# Altium PCB PCB1.PcbDoc
Units mil, origin at the board's own origin, x right, y up, seen from the top; angles counter-clockwise.
Board outline 6000 x 4000 mil, 2 copper layers (Top Layer, Bottom Layer); 124 components, 250 nets, 584 pads, 0 vias.
Unrouted connection lines stored in the file: 295.
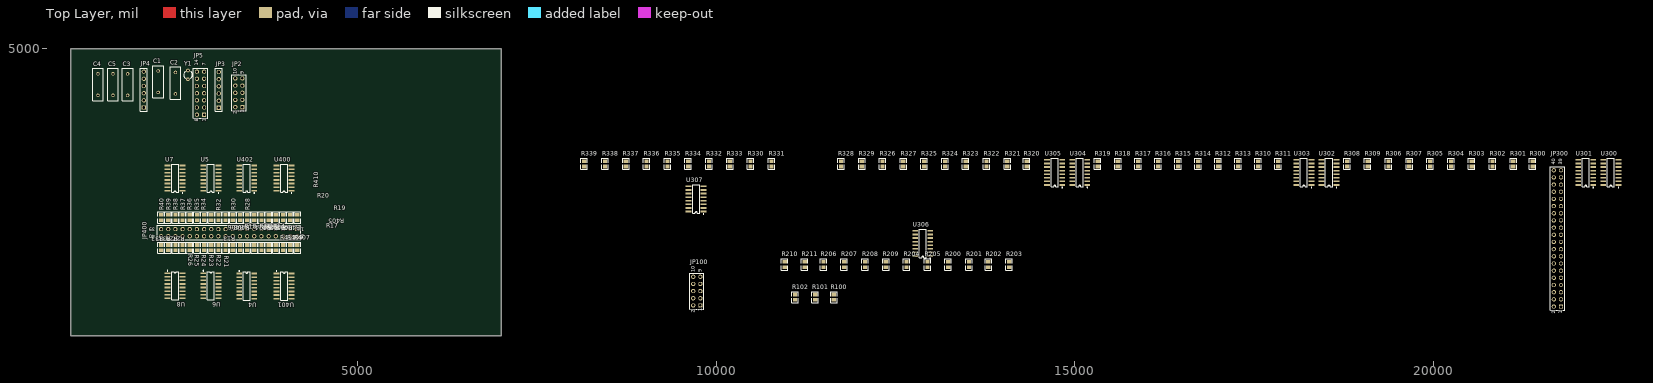
[diagram p0: Top Layer view]
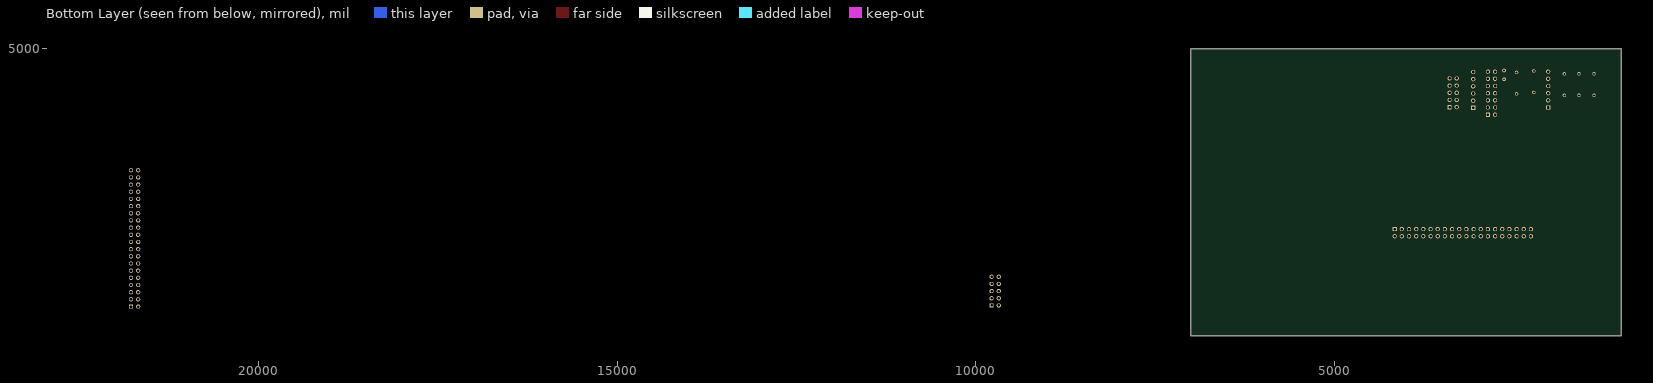
[diagram p1: Bottom Layer view, seen from below]

## Layer stack, top to bottom
Top Layer: signal copper 1.4
Dielectric: dielectric 12.6, FR-4, Dk 4.8
Bottom Layer: signal copper 1.4

## Board outline
1000,1000 7000,1000 7000,5000 1000,5000

## Design rules (kind name [scope] priority, off if disabled: settings)
Clearance [All] p1: gap=10
ComponentClearance [All] p1: gap=10 collisioncheckmode=0
PolygonConnect [All] p1: connectstyle=Relief reliefconductorwidth=10 reliefentries=4 polygonreliefangle="90 Angle"
RoomDefinition U_ShiftregisterTeil1 [InComponentClass('U_ShiftregisterTeil1')] p1: confinementstyle=ConfineIn formatcopy=TRUE outline 8105,1290 22630,1290 22630,3585 8105,3585
RoomDefinition U_farbBorg [InComponentClass('U_farbBorg')] p2: confinementstyle=ConfineIn formatcopy=TRUE outline 1215,3960 3635,3960 3635,4955 1215,4955
RoomDefinition U_ShiftregisterTeil2 [InComponentClass('U_ShiftregisterTeil2')] p3: confinementstyle=ConfineIn formatcopy=TRUE outline 1655,1310 4855,1310 4855,3735 1655,3735
RoomDefinition U_MMC-CAN [InComponentClass('U_MMC-CAN')] p4: confinementstyle=ConfineIn formatcopy=TRUE outline 4695,3915 6695,3915 6695,4915 4695,4915
RoutingLayers [All] p1: top layer=Horizontal bottom layer=Vertical
RoutingVias [All] p1: holewidth=28 width=50 viastyle="Through Hole" minholewidth=28 minwidth=50 maxholewidth=28 maxwidth=50
SolderMaskExpansion [All] p1: expansion=4
TestPointUsage [All] p1: valid=0 allowmultiple=FALSE
Testpoint [All] p1: side=15 testpointundercomponent=TRUE minsize=40 maxsize=100 preferedsize=60 minholesize=0 maxholesize=40 preferedholesize=32 testpointgrid=1 style=1023 order=-539222988
Width [All] p1: maxlimit=10 minlimit=10 preferedwidth=10
16 further rules are at their usual default settings.

## Classes and differential pairs
component class U_farbBorg: C1 C2 C3 C4 C5 JP2 JP3 JP4 JP5 JP100 R100 R101 R102 Y1
component class U_MMC-CAN: Q1 Q2 Q3 Q4 Q5 Q6 Q7 Q8 R200 R201 R202 R203 R204 R205 R206 R207 R208 R209 R210 R211
component class U_ShiftregisterTeil2: JP400 R12 R13 R14 R15 R16 R17 R18 R19 R20 R21 R22 R23 R24 R25 R26 R27 R28 R29 R30 R31 R32 R33 R34 R35 R36 R37 R38 R39 R40 R400 R401 R402 R403 R404 R405 R406 R407 R408 R409 R410 R411 U1 U4 U5 U6 U7 U8 U400 U401 U402
component class U_ShiftregisterTeil1: JP300 R300 R301 R302 R303 R304 R305 R306 R307 R308 R309 R310 R311 R312 R313 R314 R315 R316 R317 R318 R319 R320 R321 R322 R323 R324 R325 R326 R327 R328 R329 R330 R331 R332 R333 R334 R335 R336 R337 R338 R339 U300 U301 U302 U303 U304 U305 U306 U307
net class A[0..14]: A0 A1 A2 A3 A4 A5 A6 A7 A8 A9 A10 A11 A12 A13 A14
net class D[0..7]: D0 D1 D2 D3 D4 D5 D6 D7

## Components (designator, comment, footprint, x,y, rotation, side; value= is the part's Value field where it differs from the comment)
C1 "Cap" RAD-0.3 2220,4540 r90 top
C2 "Cap" RAD-0.3 2460,4520 r90 top
C3 "Cap" RAD-0.3 1795,4500 r90 top
C4 "Cap" RAD-0.3 1380,4500 r90 top
C5 "Cap" RAD-0.3 1590,4500 r90 top
JP2 "AVR-JTAG-PROG" HDR2X5 3395,4185 r90 top
JP3 "JTAG-CPLD" HDR1X6 3065,4175 r90 top
JP4 "Joystick" HDR1X6 2020,4180 r90 top
JP5 "Header 7X2A" HDR2X7_CEN 2860,4080 r90 top
JP100 "AVR-SPI-PROG" HDR2X5 9780,1420 r90 top
JP300 "Header 20X2" HDR2X20 21780,1405 r90 top
JP400 "Header 20X2" HDR2X20 4160,2485 r180 top
R13 "" CR2012-0805 3260,2645 r270 top
R14 "" CR2012-0805 3860,2225 r90 top
R15 "" CR2012-0805 3760,2225 r90 top
R16 "" CR2012-0805 3660,2225 r90 top
R17 "" CR2012-0805 3560,2225 r90 top
R18 "" CR2012-0805 3460,2225 r90 top
R19 "" CR2012-0805 3360,2225 r90 top
R20 "" CR2012-0805 3260,2225 r90 top
R21 "" CR2012-0805 3160,2645 r270 top
R22 "" CR2012-0805 3060,2645 r270 top
R23 "" CR2012-0805 2960,2645 r270 top
R24 "" CR2012-0805 2860,2645 r270 top
R25 "" CR2012-0805 2760,2645 r90 top
R26 "" CR2012-0805 2660,2645 r90 top
R27 "" CR2012-0805 2560,2645 r270 top
R28 "" CR2012-0805 3160,2225 r90 top
R29 "" CR2012-0805 2460,2645 r270 top
R30 "" CR2012-0805 3060,2225 r90 top
R31 "" CR2012-0805 2360,2645 r270 top
R32 "" CR2012-0805 2960,2225 r90 top
R33 "" CR2012-0805 2260,2645 r270 top
R34 "" CR2012-0805 2860,2225 r90 top
R35 "" CR2012-0805 2760,2225 r90 top
R36 "" CR2012-0805 2660,2225 r90 top
R37 "" CR2012-0805 2560,2225 r90 top
R38 "" CR2012-0805 2460,2225 r90 top
R39 "" CR2012-0805 2360,2225 r90 top
R40 "" CR2012-0805 2260,2225 r90 top
R100 "PullUp" CR2012-0805 11640,1535 r90 top
R101 "PullUp" CR2012-0805 11380,1535 r90 top
R102 "PullUp" CR2012-0805 11100,1535 r90 top
R200 "Res2" CR2012-0805 13235,1990 r90 top
R201 "Res2" CR2012-0805 13525,1990 r90 top
R202 "Res2" CR2012-0805 13795,1990 r90 top
R203 "Res2" CR2012-0805 14085,1990 r90 top
R204 "Res2" CR2012-0805 12655,1990 r90 top
R205 "Res2" CR2012-0805 12945,1990 r90 top
R206 "Res2" CR2012-0805 11495,1990 r90 top
R207 "Res2" CR2012-0805 11785,1990 r90 top
R208 "Res2" CR2012-0805 12075,1990 r90 top
R209 "Res2" CR2012-0805 12365,1990 r90 top
R210 "Res2" CR2012-0805 10955,1990 r90 top
R211 "Res2" CR2012-0805 11235,1990 r90 top
R300 "" CR2012-0805 21385,3395 r90 top
R301 "" CR2012-0805 21115,3395 r90 top
R302 "" CR2012-0805 20825,3395 r90 top
R303 "" CR2012-0805 20535,3395 r90 top
R304 "" CR2012-0805 20245,3395 r90 top
R305 "" CR2012-0805 19955,3395 r90 top
R306 "" CR2012-0805 19375,3395 r90 top
R307 "" CR2012-0805 19665,3395 r90 top
R308 "" CR2012-0805 18795,3395 r90 top
R309 "" CR2012-0805 19085,3395 r90 top
R310 "" CR2012-0805 17555,3395 r90 top
R311 "" CR2012-0805 17835,3395 r90 top
R312 "" CR2012-0805 17000,3395 r90 top
R313 "" CR2012-0805 17275,3395 r90 top
R314 "" CR2012-0805 16720,3395 r90 top
R315 "" CR2012-0805 16440,3395 r90 top
R316 "" CR2012-0805 16160,3395 r90 top
R317 "" CR2012-0805 15880,3395 r90 top
R318 "" CR2012-0805 15600,3395 r90 top
R319 "" CR2012-0805 15320,3395 r90 top
R320 "" CR2012-0805 14330,3395 r90 top
R321 "" CR2012-0805 14060,3395 r90 top
R322 "" CR2012-0805 13770,3395 r90 top
R323 "" CR2012-0805 13480,3395 r90 top
R324 "" CR2012-0805 13190,3395 r90 top
R325 "" CR2012-0805 12900,3395 r90 top
R326 "" CR2012-0805 12320,3395 r90 top
R327 "" CR2012-0805 12610,3395 r90 top
R328 "" CR2012-0805 11740,3395 r90 top
R329 "" CR2012-0805 12030,3395 r90 top
R330 "" CR2012-0805 10480,3395 r90 top
R331 "" CR2012-0805 10770,3395 r90 top
R332 "" CR2012-0805 9900,3395 r90 top
R333 "" CR2012-0805 10190,3395 r90 top
R334 "" CR2012-0805 9610,3395 r90 top
R335 "" CR2012-0805 9320,3395 r90 top
R336 "" CR2012-0805 9030,3395 r90 top
R337 "" CR2012-0805 8740,3395 r90 top
R338 "" CR2012-0805 8450,3395 r90 top
R339 "" CR2012-0805 8160,3395 r90 top
R400 "" CR2012-0805 4160,2645 r270 top
R401 "" CR2012-0805 4060,2645 r270 top
R402 "" CR2012-0805 3960,2645 r270 top
R403 "" CR2012-0805 3860,2645 r270 top
R404 "" CR2012-0805 3760,2645 r270 top
R405 "" CR2012-0805 3660,2645 r270 top
R406 "" CR2012-0805 3560,2645 r270 top
R407 "" CR2012-0805 4160,2225 r90 top
R408 "" CR2012-0805 3460,2645 r270 top
R409 "" CR2012-0805 4060,2225 r90 top
R410 "" CR2012-0805 3360,2645 r270 top
R411 "" CR2012-0805 3960,2225 r90 top
U4 "SN74HC595D" D016 3455,1690 r270 top
U5 "SN74HC595D" D016 2955,3195 r90 top
U6 "SN74HC595D" D016 2955,1695 r270 top
U7 "SN74HC595D" D016 2455,3195 r90 top
U8 "SN74HC595D" D016 2455,1695 r270 top
U300 "SN74HC595D" D016 22475,3275 r90 top
U301 "SN74HC595D" D016 22125,3275 r90 top
U302 "SN74HC595D" D016 18545,3275 r90 top
U303 "SN74HC595D" D016 18195,3275 r90 top
U304 "SN74HC595D" D016 15070,3275 r90 top
U305 "SN74HC595D" D016 14720,3275 r90 top
U306 "SN74HC595D" D016 12880,2285 r90 top
U307 "SN74HC595D" D016 9720,2905 r90 top
U400 "SN74HC595D" D016 3975,3195 r90 top
U401 "SN74HC595D" D016 3975,1690 r270 top
U402 "SN74HC595D" D016 3455,3195 r90 top
Y1 "16Mhz" BCY-W2/D3.1 2635,4635 r0 top

## Footprints (in the part's own frame and the unit in brackets; to place one, negate y for a bottom-side part, rotate by r counter-clockwise, add the part's x,y. Pads: shape width x height; smd on the part's side, far side on the other; paste and mask are expansions set on the pad)
BCY-W2/D3.1 [mm]
  round 1.3 hole 0.7: 1(0,1.55) 2(0,-1.55)
  silkscreen extent -1.55,-1.19 1.55,1.17
CR2012-0805 [mm]
  rect 1.3x1.5 smd: 1(-0.95,0) 2(0.95,0)
  silkscreen extent -2,-1.15 2,1.15
D016 [mm] "Small Outline; 16 Leads; Body Width 3.9 mm; Pitch 1.27 mm"
  rect 0.6x2.05 smd: 1(-4.445,-2.675) 2(-3.175,-2.675) 3(-1.905,-2.675) 4(-0.635,-2.675) 5(0.635,-2.675) 6(1.905,-2.675) 7(3.175,-2.675) 8(4.445,-2.675) 9(4.445,2.675) 10(3.175,2.675) 11(1.905,2.675) 12(0.635,2.675) 13(-0.635,2.675) 14(-1.905,2.675) 15(-3.175,2.675) 16(-4.445,2.675)
  silkscreen extent -5.42,-2.8 5,1.25
HDR1X6 [mm] "Connector; Header; 6 Position"
  rect 1.5x1.5 hole 0.9: 1(0,0)
  round 1.5 hole 0.9: 2(2.54,0) 3(5.08,0) 4(7.62,0) 5(10.16,0) 6(12.7,0)
  silkscreen extent -1.27,-1.27 13.97,1.27
HDR2X5 [mm] "Connector; Header; 5x2 Position"
  rect 1.5x1.5 hole 0.9: 1(0,0)
  round 1.5 hole 0.9: 2(0,2.54) 3(2.54,0) 4(2.54,2.54) 5(5.08,0) 6(5.08,2.54) 7(7.62,0) 8(7.62,2.54) 9(10.16,0) 10(10.16,2.54)
  silkscreen extent -1.27,-1.27 11.43,3.81
HDR2X7_CEN [mm] "Connector; Header; 7x2 Position"
  rect 1.5x1.5 hole 0.9: 1(0,0)
  round 1.5 hole 0.9: 2(2.54,0) 3(5.08,0) 4(7.62,0) 5(10.16,0) 6(12.7,0) 7(15.24,0) 8(0,2.54) 9(2.54,2.54) 10(5.08,2.54) 11(7.62,2.54) 12(10.16,2.54) 13(12.7,2.54) 14(15.24,2.54)
  silkscreen extent -1.27,-1.27 16.51,3.81
HDR2X20 [mm] "Connector; Header; 20x2 Position"
  rect 1.5x1.5 hole 0.9: 1(0,0)
  round 1.5 hole 0.9: 2(0,2.54) 3(2.54,0) 4(2.54,2.54) 5(5.08,0) 6(5.08,2.54) 7(7.62,0) 8(7.62,2.54) 9(10.16,0) 10(10.16,2.54) 11(12.7,0) 12(12.7,2.54) 13(15.24,0) 14(15.24,2.54) 15(17.78,0) 16(17.78,2.54) 17(20.32,0) 18(20.32,2.54) 19(22.86,0) 20(22.86,2.54) 21(25.4,0) 22(25.4,2.54) 23(27.94,0) 24(27.94,2.54) 25(30.48,0) 26(30.48,2.54) 27(33.02,0) 28(33.02,2.54) 29(35.56,0) 30(35.56,2.54) 31(38.1,0) 32(38.1,2.54) 33(40.64,0) 34(40.64,2.54) 35(43.18,0) 36(43.18,2.54) 37(45.72,0) 38(45.72,2.54) 39(48.26,0) 40(48.26,2.54)
  silkscreen extent -1.27,-1.27 49.53,3.81
RAD-0.3 [mm]
  round 1.2 hole 0.7: 1(-3.81,0) 2(3.81,0)
  silkscreen extent -5.71,-1.91 5.71,1.91

## Part data
C1 C2 C3 C4 C5: "Capacitor"
JP2 JP100: library part "Header 5X2", "Header, 5-Pin, Dual row"
JP3 JP4: library part "Header 6", "Header, 6-Pin"
JP5: "Header, 7-Pin, Dual row"
JP300 JP400: "Header, 20-Pin, Dual row"
R13 R14 R15 R16 R17 R18 R19 R20 R21 R22 R23 R24 R25 R26 R27 R28 R29 R30 R31 R32 R33 R34 R35 R36 R37 R38 R39 R40 R100 R101 R102 R300 R301 R302 R303 R304 R305 R306 R307 R308 R309 R310 R311 R312 R313 R314 R315 R316 R317 R318 R319 R320 R321 R322 R323 R324 R325 R326 R327 R328 R329 R330 R331 R332 R333 R334 R335 R336 R337 R338 R339 R400 R401 R402 R403 R404 R405 R406 R407 R408 R409 R410 R411: library part Res2, "Resistor"
R200 R201 R202 R203 R204 R205 R206 R207 R208 R209 R210 R211: "Resistor"
U4 U5 U6 U7 U8 U300 U301 U302 U303 U304 U305 U306 U307 U400 U401 U402: "8-Bit Shift Register with 3-State Output Registers"
Y1: library part XTAL, "Crystal Oscillator"

## Nets (pads, with @x,y where several pads share a name; then routed paths per layer and width w, separated by ;. In a path a pad name is that pad's centre, name@x,y a point inside that pad or via, vN(x,y) a via of type N, cw(c..) or ccw(c..) an arc to the next point about the centre after c; other vN are vias at no path point)
A0: 
A1: 
A2: 
A3: 
A4: 
A5: 
A6: 
A7: 
A8: 
A9: 
A10: 
A11: 
A12: 
A13: 
A14: 
AVR-MISO: 
AVR-MOSI: 
AVR-PMISO: JP100.9
AVR-PMOSI: JP100.1
AVR-RESET: JP2.4 JP100.5 R102.2
AVR-SCK: JP100.7
AVR-TCK: JP2.1
AVR-TDI: JP2.9
AVR-TDO: JP2.3
AVR-TMS: JP2.5
CAN-CS: R101.1
CPLD-CLK: 
CPLD-EN: 
CPLD-TCK: JP3.4
CPLD-TDI: JP3.2
CPLD-TDO: JP3.3
CPLD-TMS: JP3.1
D0: U300.14
D1: U303.14
D2: U304.14
D3: U307.14
D4: U400.14
D5: U4.14
D6: U5.14
D7: U8.14
GND: C1.2 C2.1 C3.1 C4.1 C5.1 JP2.2 JP2.10 JP3.5 JP4.6 JP100.3 JP100.4 JP100.6 JP100.8 JP100.10 U4.8 U4.13 U5.8 U5.13 U6.8 U6.13 U7.8 U7.13 U8.8 U8.13 U300.8 U300.13 U301.8 U301.13 U302.8 U302.13 U303.8 U303.13 U304.8 U304.13 U305.8 U305.13 U306.8 U306.13 U307.8 U307.13 U400.8 U400.13 U401.8 U401.13 U402.8 U402.13
JOY-DOWN: JP4.2
JOY-FIRE: JP4.5
JOY-LEFT: JP4.4
JOY-RIGHT: JP4.3
JOY-UP: JP4.1
MISO: R203.1
MISO3V: R205.2
MMC-CS: R100.1 R211.2
MMC-CS3V: R209.1
MOSI: R210.2
MOSI3V: R207.1
NetC1_1: C1.1 Y1.2
NetC2_2: C2.2 Y1.1
NetJP5_1: JP5.1
NetJP5_2: JP5.2
NetJP5_3: JP5.3
NetJP5_4: JP5.4
NetJP5_5: JP5.5
NetJP5_6: JP5.6
NetJP5_7: JP5.7
NetJP5_8: JP5.8
NetJP5_9: JP5.9
NetJP5_10: JP5.10
NetJP5_11: JP5.11
NetJP5_12: JP5.12
NetJP5_13: JP5.13
NetJP5_14: JP5.14
NetJP300_1: JP300.1 R300.2
NetJP300_2: JP300.2 R307.2
NetJP300_3: JP300.3 R301.2
NetJP300_4: JP300.4 R309.2
NetJP300_5: JP300.5 R302.2
NetJP300_6: JP300.6 R311.2
NetJP300_7: JP300.7 R303.2
NetJP300_8: JP300.8 R313.2
NetJP300_9: JP300.9 R304.2
NetJP300_10: JP300.10 R314.2
NetJP300_11: JP300.11 R305.2
NetJP300_12: JP300.12 R315.2
NetJP300_13: JP300.13 R306.2
NetJP300_14: JP300.14 R316.2
NetJP300_15: JP300.15 R308.2
NetJP300_16: JP300.16 R317.2
NetJP300_17: JP300.17 R310.2
NetJP300_18: JP300.18 R318.2
NetJP300_19: JP300.19 R312.2
NetJP300_20: JP300.20 R319.2
NetJP300_21: JP300.21 R320.2
NetJP300_22: JP300.22 R327.2
NetJP300_23: JP300.23 R321.2
NetJP300_24: JP300.24 R329.2
NetJP300_25: JP300.25 R322.2
NetJP300_26: JP300.26 R331.2
NetJP300_27: JP300.27 R323.2
NetJP300_28: JP300.28 R333.2
NetJP300_29: JP300.29 R324.2
NetJP300_30: JP300.30 R334.2
NetJP300_31: JP300.31 R325.2
NetJP300_32: JP300.32 R335.2
NetJP300_33: JP300.33 R326.2
NetJP300_34: JP300.34 R336.2
NetJP300_35: JP300.35 R328.2
NetJP300_36: JP300.36 R337.2
NetJP300_37: JP300.37 R330.2
NetJP300_38: JP300.38 R338.2
NetJP300_39: JP300.39 R332.2
NetJP300_40: JP300.40 R339.2
NetJP400_1: JP400.1 R400.2
NetJP400_2: JP400.2 R407.2
NetJP400_3: JP400.3 R401.2
NetJP400_4: JP400.4 R409.2
NetJP400_5: JP400.5 R402.2
NetJP400_6: JP400.6 R411.2
NetJP400_7: JP400.7 R403.2
NetJP400_8: JP400.8 R14.2
NetJP400_9: JP400.9 R404.2
NetJP400_10: JP400.10 R15.2
NetJP400_11: JP400.11 R405.2
NetJP400_12: JP400.12 R16.2
NetJP400_13: JP400.13 R406.2
NetJP400_14: JP400.14 R17.2
NetJP400_15: JP400.15 R408.2
NetJP400_16: JP400.16 R18.2
NetJP400_17: JP400.17 R410.2
NetJP400_18: JP400.18 R19.2
NetJP400_19: JP400.19 R13.2
NetJP400_20: JP400.20 R20.2
NetJP400_21: JP400.21 R21.2
NetJP400_22: JP400.22 R28.2
NetJP400_23: JP400.23 R22.2
NetJP400_24: JP400.24 R30.2
NetJP400_25: JP400.25 R23.2
NetJP400_26: JP400.26 R32.2
NetJP400_27: JP400.27 R24.2
NetJP400_28: JP400.28 R34.2
NetJP400_29: JP400.29 R25.2
NetJP400_30: JP400.30 R35.2
NetJP400_31: JP400.31 R26.2
NetJP400_32: JP400.32 R36.2
NetJP400_33: JP400.33 R27.2
NetJP400_34: JP400.34 R37.2
NetJP400_35: JP400.35 R29.2
NetJP400_36: JP400.36 R38.2
NetJP400_37: JP400.37 R31.2
NetJP400_38: JP400.38 R39.2
NetJP400_39: JP400.39 R33.2
NetJP400_40: JP400.40 R40.2
NetQ200_1: R200.1
NetQ201_1: R202.1
NetQ202_1: R204.1
NetQ203_1: R205.1
NetQ204_1: R206.1
NetQ205_1: R208.1
NetQ206_1: R210.1
NetQ207_1: R211.1
NetR13_1: R13.1 U402.1
NetR14_1: R14.1 U4.6
NetR15_1: R15.1 U4.5
NetR16_1: R16.1 U4.4
NetR17_1: R17.1 U4.3
NetR18_1: R18.1 U4.2
NetR19_1: R19.1 U4.1
NetR20_1: R20.1 U4.15
NetR21_1: R21.1 U5.15
NetR22_1: R22.1 U5.1
NetR23_1: R23.1 U5.2
NetR24_1: R24.1 U5.3
NetR25_1: R25.1 U5.4
NetR26_1: R26.1 U5.5
NetR27_1: R27.1 U5.6
NetR28_1: R28.1 U6.1
NetR29_1: R29.1 U5.7
NetR30_1: R30.1 U6.15
NetR31_1: R31.1 U7.15
NetR32_1: R32.1 U8.7
NetR33_1: R33.1 U7.1
NetR34_1: R34.1 U8.6
NetR35_1: R35.1 U8.5
NetR36_1: R36.1 U8.4
NetR37_1: R37.1 U8.3
NetR38_1: R38.1 U8.2
NetR39_1: R39.1 U8.1
NetR40_1: R40.1 U8.15
NetR300_1: R300.1 U300.15
NetR301_1: R301.1 U300.1
NetR302_1: R302.1 U300.2
NetR303_1: R303.1 U300.3
NetR304_1: R304.1 U300.4
NetR305_1: R305.1 U300.5
NetR306_1: R306.1 U300.6
NetR307_1: R307.1 U301.1
NetR308_1: R308.1 U300.7
NetR309_1: R309.1 U301.15
NetR310_1: R310.1 U302.15
NetR311_1: R311.1 U303.7
NetR312_1: R312.1 U302.1
NetR313_1: R313.1 U303.6
NetR314_1: R314.1 U303.5
NetR315_1: R315.1 U303.4
NetR316_1: R316.1 U303.3
NetR317_1: R317.1 U303.2
NetR318_1: R318.1 U303.1
NetR319_1: R319.1 U303.15
NetR320_1: R320.1 U304.15
NetR321_1: R321.1 U304.1
NetR322_1: R322.1 U304.2
NetR323_1: R323.1 U304.3
NetR324_1: R324.1 U304.4
NetR325_1: R325.1 U304.5
NetR326_1: R326.1 U304.6
NetR327_1: R327.1 U305.1
NetR328_1: R328.1 U304.7
NetR329_1: R329.1 U305.15
NetR330_1: R330.1 U306.15
NetR331_1: R331.1 U307.7
NetR332_1: R332.1 U306.1
NetR333_1: R333.1 U307.6
NetR334_1: R334.1 U307.5
NetR335_1: R335.1 U307.4
NetR336_1: R336.1 U307.3
NetR337_1: R337.1 U307.2
NetR338_1: R338.1 U307.1
NetR339_1: R339.1 U307.15
NetR400_1: R400.1 U400.15
NetR401_1: R401.1 U400.1
NetR402_1: R402.1 U400.2
NetR403_1: R403.1 U400.3
NetR404_1: R404.1 U400.4
NetR405_1: R405.1 U400.5
NetR406_1: R406.1 U400.6
NetR407_1: R407.1 U401.1
NetR408_1: R408.1 U400.7
NetR409_1: R409.1 U401.15
NetR410_1: R410.1 U402.15
NetR411_1: R411.1 U4.7
NetU5_9: U5.9 U7.14
NetU6_14: U6.14 U8.9
NetU100_33: 
NetU100_34: 
NetU300_9: U300.9 U302.14
NetU304_9: U304.9 U306.14
NetU305_14: U305.14 U307.9
NetU400_9: U400.9 U402.14
SCK: R204.2
SCK3V: R201.1
SHIFTCLK: U4.11 U5.11 U6.11 U7.11 U8.11 U300.11 U301.11 U302.11 U303.11 U304.11 U305.11 U306.11 U307.11 U400.11 U401.11 U402.11
SHIFTOUTCLK: U4.12 U5.12 U6.12 U7.12 U8.12 U300.12 U301.12 U302.12 U303.12 U304.12 U305.12 U306.12 U307.12 U400.12 U401.12 U402.12
VCC: C3.2 C4.2 C5.2 JP3.6 R100.2 R101.2 R102.1 U4.9 U4.10 U4.16 U5.10 U5.16 U6.10 U6.16 U7.10 U7.16 U8.10 U8.16 U300.10 U300.16 U301.10 U301.14 U301.16 U302.10 U302.16 U303.9 U303.10 U303.16 U304.10 U304.16 U305.10 U305.16 U306.10 U306.16 U307.10 U307.16 U400.10 U400.16 U401.10 U401.14 U401.16 U402.10 U402.16
VCC3V: R200.2 R201.2 R202.2 R203.2 R206.2 R207.2 R208.2 R209.2
pads on no net: JP2.6 JP2.7 JP2.8 JP100.2 U6.2 U6.3 U6.4 U6.5 U6.6 U6.7 U6.9 U7.2 U7.3 U7.4 U7.5 U7.6 U7.7 U7.9 U301.2 U301.3 U301.4 U301.5 U301.6 U301.7 U301.9 U302.2 U302.3 U302.4 U302.5 U302.6 U302.7 U302.9 U305.2 U305.3 U305.4 U305.5 U305.6 U305.7 U305.9 U306.2 U306.3 U306.4 U306.5 U306.6 U306.7 U306.9 U401.2 U401.3 U401.4 U401.5 U401.6 U401.7 U401.9 U402.2 U402.3 U402.4 U402.5 U402.6 U402.7 U402.9

## Text inside footprints (layer, text, board x,y; h text height)
JP2: Top Overlay "2" at 3315,4085 h50 r90; Top Overlay "1" at 3415,4105 h50 r90; Top Overlay "9" at 3415,4645 h50 r90; Top Overlay "10" at 3315,4645 h50 r90
JP5: Top Overlay "8" at 2780,3980 h50 r90; Top Overlay "1" at 2880,3980 h50 r90; Top Overlay "7" at 2880,4760 h50 r90; Top Overlay "14" at 2780,4760 h50 r90
JP100: Top Overlay "2" at 9700,1320 h50 r90; Top Overlay "1" at 9800,1340 h50 r90; Top Overlay "9" at 9800,1880 h50 r90; Top Overlay "10" at 9700,1880 h50 r90
JP300: Top Overlay "1" at 21800,1305 h50 r90; Top Overlay "2" at 21700,1305 h50 r90; Top Overlay "40" at 21700,3385 h50 r90; Top Overlay "39" at 21800,3385 h50 r90
JP400: Top Overlay "1" at 4260,2505 h50 r180; Top Overlay "2" at 4260,2405 h50 r180; Top Overlay "40" at 2180,2405 h50 r180; Top Overlay "39" at 2180,2505 h50 r180